# Altium PCB PCB1.PcbDoc
Units mil, origin at the board's own origin, x right, y up, seen from the top; angles counter-clockwise.
Board outline 6000 x 4000 mil, 2 copper layers (Top Layer, Bottom Layer); 16 components, 11 nets, 91 pads, 0 vias.
Unrouted connection lines stored in the file: 15.
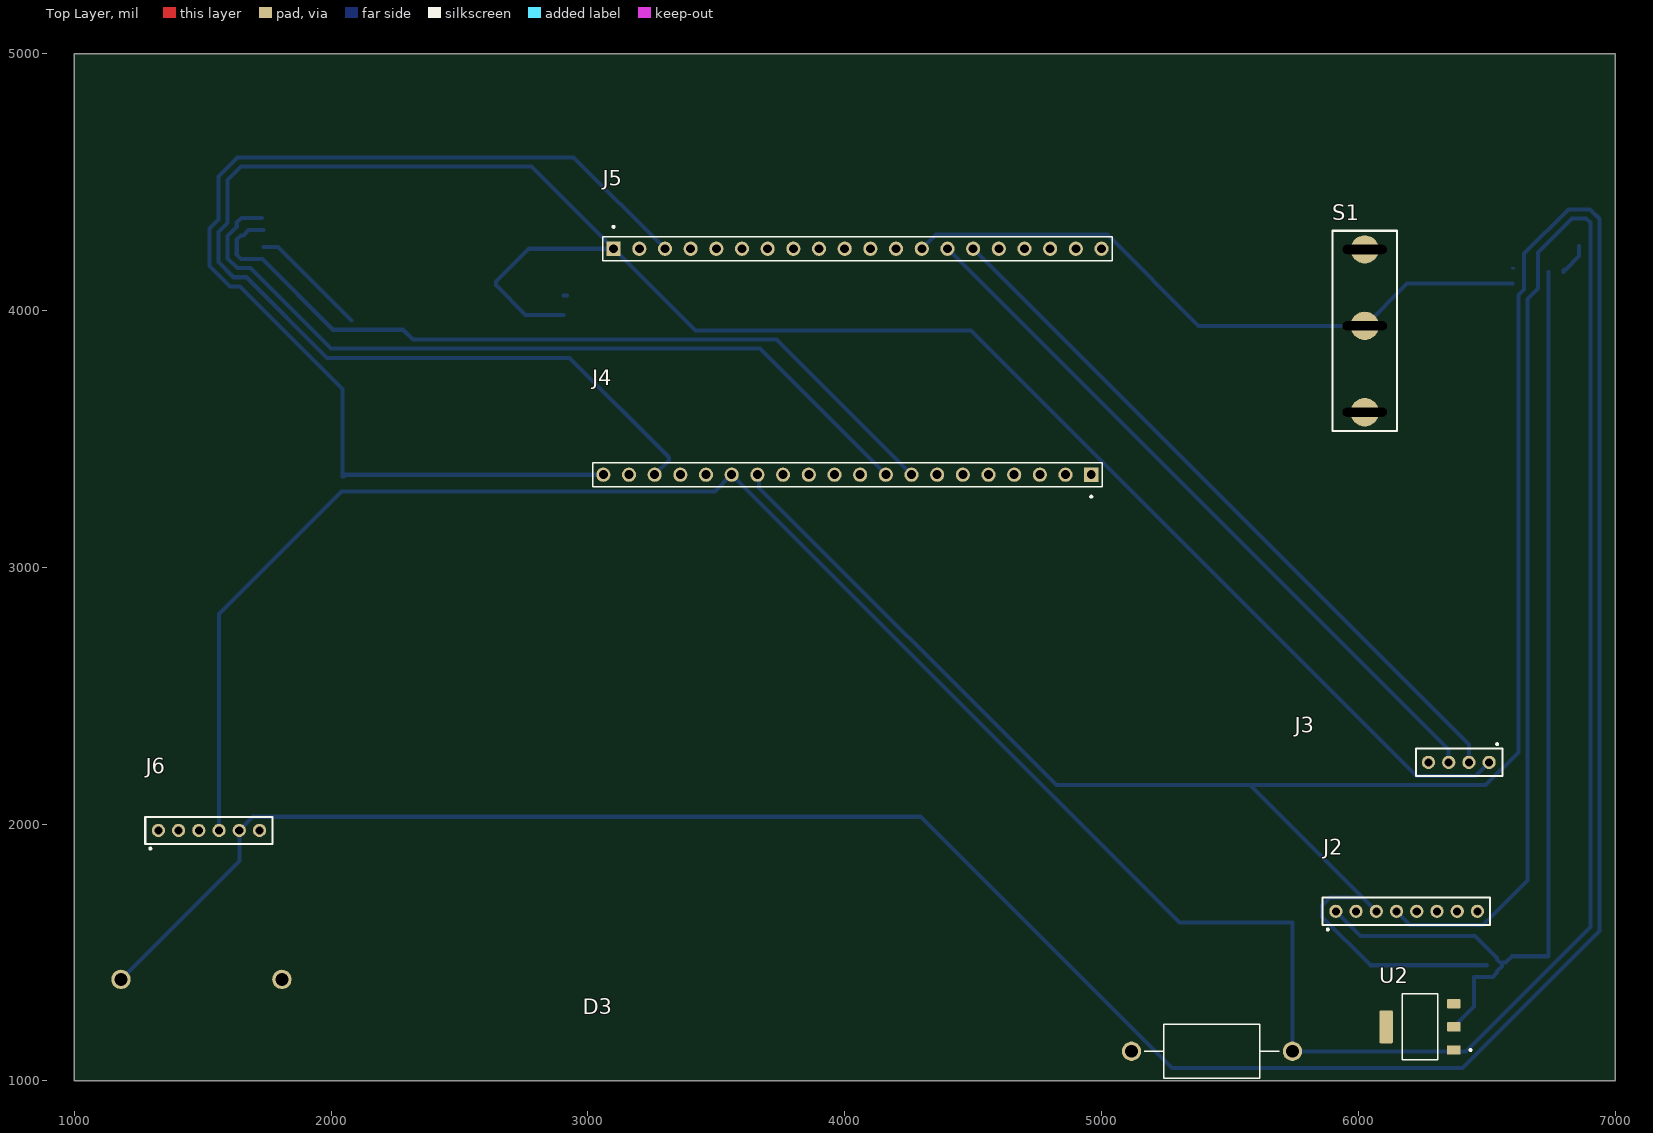
[diagram p0: Top Layer view]
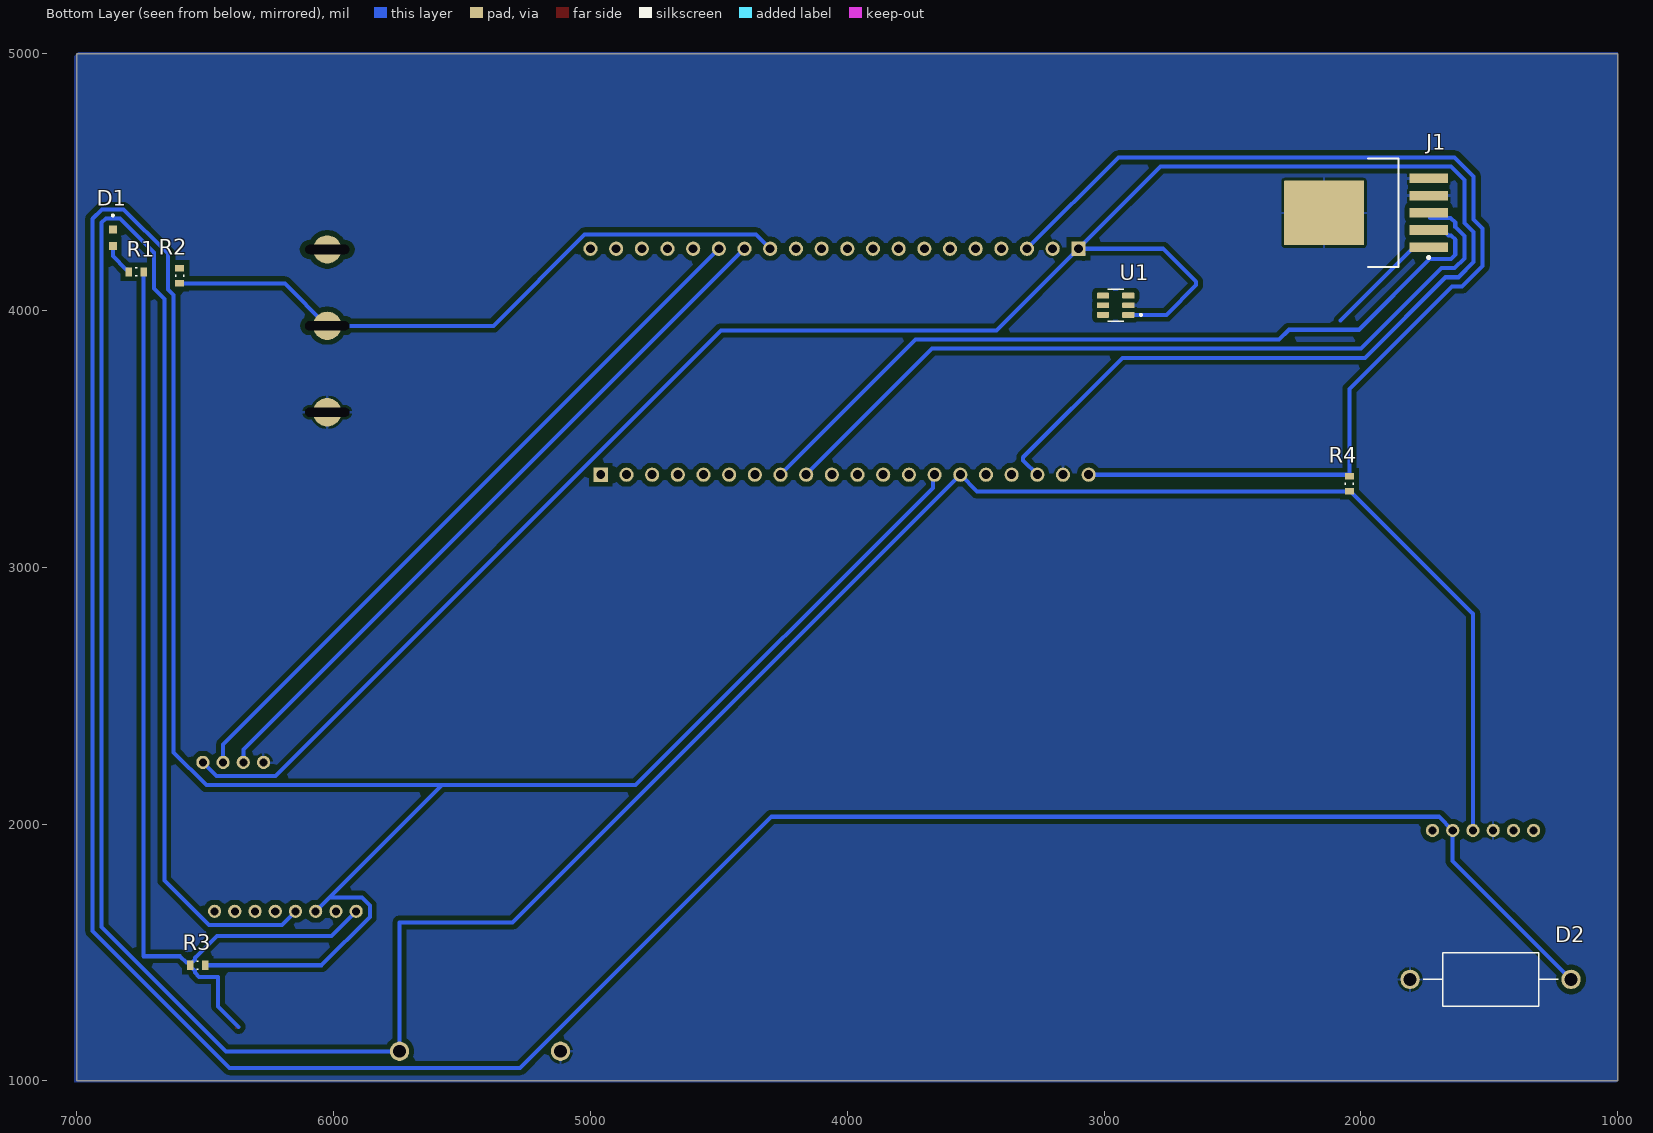
[diagram p1: Bottom Layer view, seen from below]
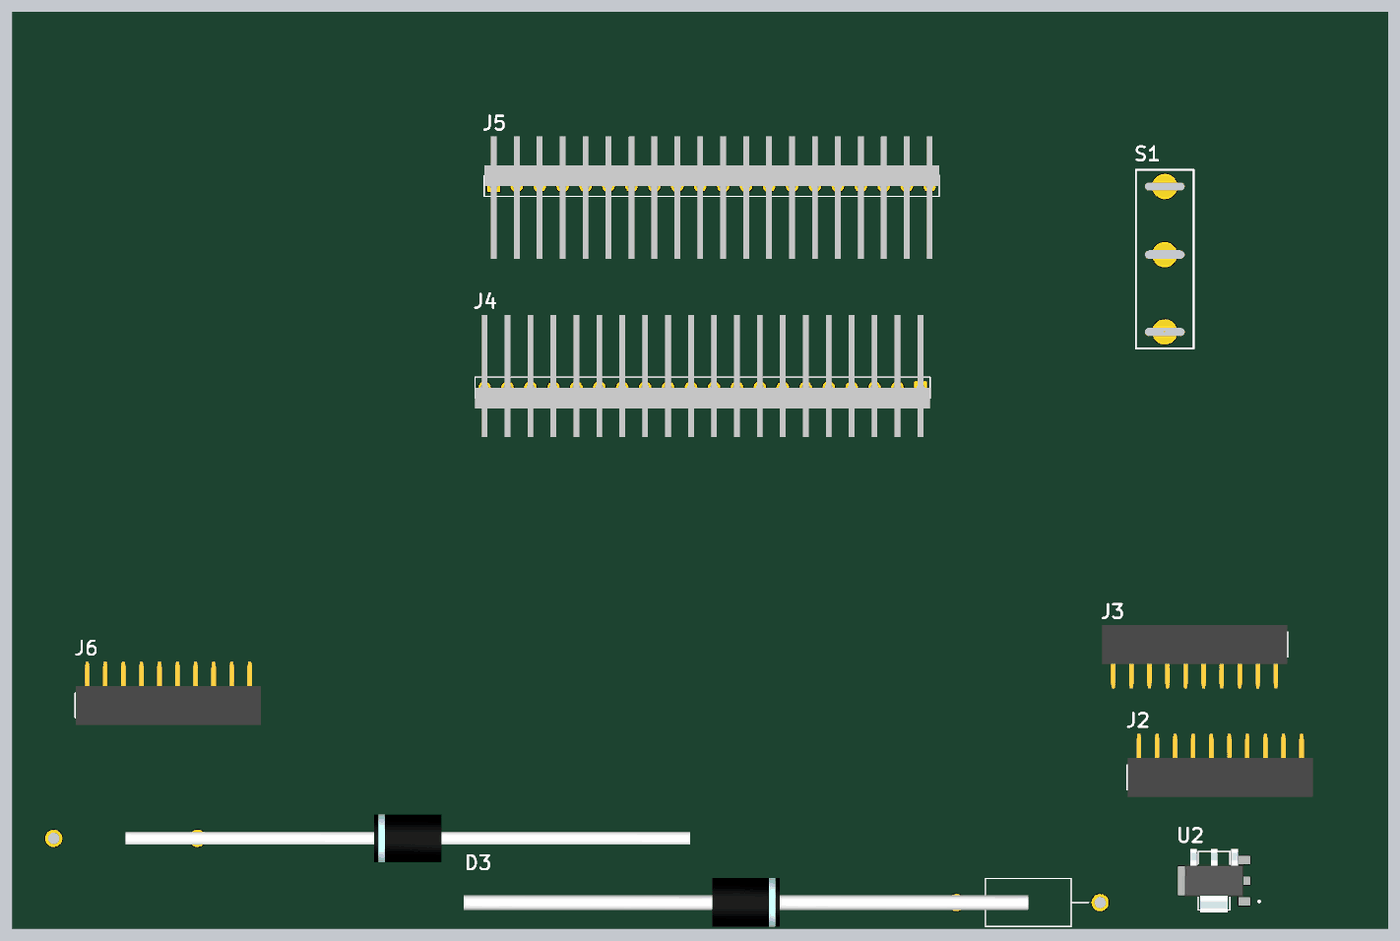
[diagram p2: 3D render of the assembled board from above, using the file's embedded part models]
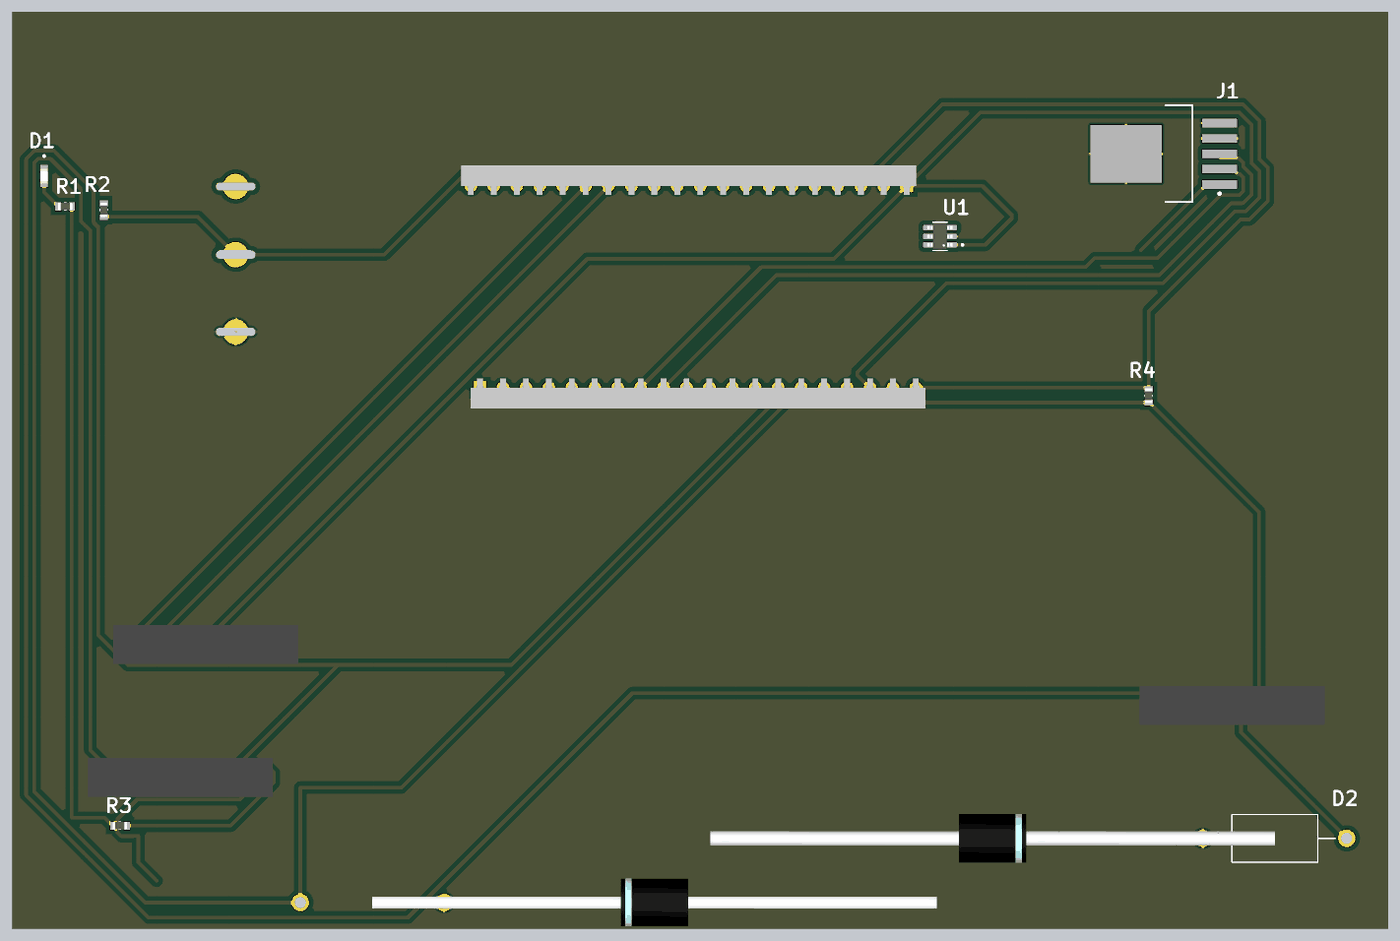
[diagram p3: 3D render of the assembled board from below, using the file's embedded part models]

## Layer stack, top to bottom
Top Solder: solder mask 0.4, Solder Resist, Dk 3.5
Top Layer: signal copper 1.4
Dielectric 1: dielectric 12.6, FR-4, Dk 4.8
Bottom Layer: signal copper 1.4
Bottom Solder: solder mask 0.4, Solder Resist, Dk 3.5

## Board outline
1000,1000 7000,1000 7000,5000 1000,5000

## Design rules (kind name [scope] priority, off if disabled: settings)
Clearance [All] p1: gap=19.68 ignorepadtopadclearanceinfootprint=FALSE
PolygonConnect [All] p1: connectstyle=Relief reliefconductorwidth=10 reliefentries=4 polygonreliefangle="90 Angle" airgapwidth=10
RoutingVias [All] p1: holewidth=28 width=50 viastyle="Through Hole" minholewidth=28 minwidth=50 maxholewidth=28 maxwidth=50
SolderMaskExpansion [All] p1: expansion=4 istentingtop=FALSE
SupplyNets "Schematic Supply Nets_2" [InNet('GND')] p1: voltage=0.000
SupplyNets "Schematic Supply Nets_1" [InNet('3V3')] p2: voltage=0.000
SupplyNets "Schematic Supply Nets" [InNet('+5')] p3: voltage=0.000
Width [All] p1: maxlimit=59.06 minlimit=15.75 preferedwidth=31.5 minimp=50.000000 maximp=50.000000 favimp=50.000000
30 further rules are at their usual default settings.

## Components (designator, comment, footprint, x,y, rotation, side; value= is the part's Value field where it differs from the comment)
D1 "led" led 6860,4282.48 r270 bottom
D2 "tvsdiode" tvsdiode 1495,1395 r0 bottom
D3 "tvsdiode" tvsdiode 5430,1115 r180 top
J1 "usbconnector" usbconnector 1980,4380 r0 bottom
J2 "8" 8 6266.85,1660 r0 top
J3 "4" 4 6155,2240 r180 top
J4 "20" 20 4010,3360 r180 top
J5 "20" 20 4050,4240 r0 top
J6 "6" 6 1681.85,1975 r0 top
R1 "smdres" smdres 6768.54,4150 r0 bottom
R2 "smdres" smdres 6600,4135 r270 bottom
R3 "smdres" smdres 6530,1450 r180 bottom
R4 "smdres" smdres 2045,3325 r270 bottom
S1 "limitswitch" limitswitch 6025,3940 r90 top
U1 "esdprotect" esdprotect 2955,4020 r0 bottom
U2 "3.3 regulator" 3.3regultor 6240,1210 r180 top

## Footprints (in the part's own frame and the unit in brackets; to place one, negate y for a bottom-side part, rotate by r counter-clockwise, add the part's x,y. Pads: shape width x height; smd on the part's side, far side on the other; paste and mask are expansions set on the pad)
3.3regultor [mm]
  rrect15% 1.31x0.93 smd: 1(-3.345,2.29) 2(-3.345,0) 3(-3.345,-2.29)
  rrect15% 1.31x3.24 smd: 4(3.345,0)
  silkscreen extent -5.1,-3.25 1.75,3.25, body extent -3.25,-3.5 3.25,3.5, height 1.8
4 [mm]
  round 1.308 hole 0.8: 1(-9,0) 2(-7,0) 3(-5,0) 4(-3,0)
  silkscreen extent -10.3,-1.9 -1.78,1.35, body extent -10.25,-2.15 10.25,4.85, height 1.25
6 [mm]
  round 1.308 hole 0.8: 1(-9,0) 2(-7,0) 3(-5,0) 4(-3,0) 5(-1,0) 6(1,0)
  silkscreen extent -10.3,-1.9 2.29,1.35, body extent -10.25,-2.15 10.25,4.85, height 1.25
8 [mm]
  round 1.308 hole 0.8: 1(-9,0) 2(-7,0) 3(-5,0) 4(-3,0) 5(-1,0) 6(1,0) 7(3,0) 8(5,0)
  silkscreen extent -10.3,-1.9 6.22,1.35, body extent -10.25,-2.15 10.25,4.85, height 1.25
20 [mil]
  rect 55x55 / inner round 55 / far side rect 55x55 hole 35: 1(-950,0)
  round 55 hole 35: 2(-850,0) 3(-750,0) 4(-650,0) 5(-550,0) 6(-450,0) 7(-350,0) 8(-250,0) 9(-150,0) 10(-50,0) 11(50,0) 12(150,0) 13(250,0) 14(350,0) 15(450,0) 16(550,0) 17(650,0) 18(750,0) 19(850,0) 20(950,0)
  silkscreen extent -992,-46 992,89, body extent -992,-318 992,215, height 46
esdprotect [mm]
  rrect25% 1.21x0.58 smd: 1(-1.255,0.95) 2(-1.255,0) 3(-1.255,-0.95) 4(1.255,-0.95) 5(1.255,0) 6(1.255,0.95)
  silkscreen extent -2.6,-1.56 0.8,1.56, body extent -1.4,-1.45 1.4,1.45, height 1.45
led [mm]
  rect 0.8x0.8 smd paste+0 mask+0.102: A(0.825,0) C(-0.825,0)
  silkscreen extent -2.32,-0.1 -2.13,0.1, body extent -0.8,-0.4 0.8,0.4, height 0.75
limitswitch [mm]
  round 2.8 hole 0.9 slot 4.4 at 90 deg: C(-8.55,0) NC(7.55,0) NO(0,0)
  silkscreen extent -10.4,-3.2 9.4,3.2
smdres [mm]
  rect 0.65x0.9 smd: 0(0.762,0) 1(-0.725,0)
  silkscreen extent -0.08,-0.4 0.08,0.4, body extent -0.8,-0.4 0.8,0.4, height 0.45
tvsdiode [mm]
  round 1.91 hole 1.27 mask+0.102: 1(-7.96,0) 2(7.96,0)
  silkscreen extent -6.68,-2.65 6.68,2.65, body extent 0,-2.7 62.5,2.7, height 2.7
usbconnector [mm] "DPAK, 5-Leads, Body 10.65x9.65mm, Pitch 1.7mm, IPC High Density"
  rrect11% 3.85x0.95 smd: 1(-6.2,3.4) 2(-6.2,1.7) 3(-6.2,0) 4(-6.2,-1.7) 5(-6.2,-3.4)
  rrect2% 7.9x6.4 smd: 6(4.15,0)
  silkscreen extent -6.32,-5.35 -0.2,5.35, body extent -3.2,-5.32 6.45,5.33, height 4.83

## Part data
D1: "Green 1.6 x 0.8 x 0.75 mm (0603) 120 Âº 180 mcd Water Clear SMT LED", Package=Package, Check_prices=https://www.snapeda.com/parts/APT1608VGC/A/Kingbright/view-part/?ref=eda, MF=Kingbright, MP=APT1608VGC/A, SnapEDA_Link=https://www.snapeda.com/parts/APT1608VGC/A/Kingbright/view-part/?ref=snap
D2 D3: "59V Clamp 169A (8/20Âµs) Ipp Tvs Diode Through Hole DO-201", Package="DO-201 Littelfuse", Check_prices=https://www.snapeda.com/parts/1.5KE33CA/STMicroelectronics/view-part/?ref=eda, MF=STMicroelectronics, MP=1.5KE33CA, SnapEDA_Link=https://www.snapeda.com/parts/1.5KE33CA/STMicroelectronics/view-part/?ref=snap
J1: library part CMP-1752-00001-1, "Single USB 2.0, Receptacle Connecter, B Type, 4 Position Through Hole, -55 to 85 degC, RoHS, Tray", ComponentLink1Description=Datasheet, ComponentLink1URL=https://cdn.harwin.com/pdfs/M701-330442.pdf, DatasheetVersion=Oct-15, PackageDescription="USB Connecter, 4 Position Through Hole, Length 12.04 mm, Height 16.25 mm, Tail Length 3.1 mm", PackageReference=M701-330442
J2 J3 J6: "Female header Temperature range: -40 ... +125 Â°C Colour: Black Connector Design: Single Row / Straight Connector Termination: THT Contact material: Gold-Plated Copper Gender of contacts: Female Housing Material: Polybutylene Terephthalate (PBT) Pitch: 2", Package=None, Check_prices=https://www.snapeda.com/parts/62001011821/W%25C3%25BCrth+Elektronik+Midcom/view-part/?ref=eda, MF="WÃ¼rth Elektronik", MP=62001011821, SnapEDA_Link=https://www.snapeda.com/parts/62001011821/W%25C3%25BCrth+Elektronik+Midcom/view-part/?ref=snap
J4 J5: "AMPMODU 20 Position Through-Hole Single Row Straight .100 Inch Header", Package=None, Centerline_Pitch="2.54 mm[.1 in]", Check_prices=https://www.snapeda.com/parts/2-87224-0/TE+Connectivity+AMP+Connectors/view-part/?ref=eda, EU_RoHS_Compliance=Compliant, MF="TE Connectivity", MP=2-87224-0, Number_of_Positions=20, Product_Type=Connector, SnapEDA_Link=https://www.snapeda.com/parts/2-87224-0/TE+Connectivity+AMP+Connectors/view-part/?ref=snap
R1 R2 R3 R4: "RES SMD 470 OHM 1% 1/10W 0603", Package="1608-2 Panasonic", Check_prices=https://www.snapeda.com/parts/ERJS03F4700V/Panasonic/view-part/?ref=eda, MF=Panasonic, MP=ERJS03F4700V, SnapEDA_Link=https://www.snapeda.com/parts/ERJS03F4700V/Panasonic/view-part/?ref=snap
S1: "Switch Snap Action N.O./N.C. SPDT Long Hinge Lever Solder 5A 250VAC 0.39N Screw Mount", Package=None, Check_prices=https://www.snapeda.com/parts/SS-5GL111/Omron/view-part/?ref=eda, MF=Omron, MP=SS-5GL111, SnapEDA_Link=https://www.snapeda.com/parts/SS-5GL111/Omron/view-part/?ref=snap
U1: "Current-limit switch and D+/Dâ€“ ESD protection for USB Host", Package="SOT-23-6 Texas Instruments", Check_prices=https://www.snapeda.com/parts/TPD3S044DBVR/Texas+Instruments/view-part/?ref=eda, MF="Texas Instruments", MP=TPD3S044DBVR, SnapEDA_Link=https://www.snapeda.com/parts/TPD3S044DBVR/Texas+Instruments/view-part/?ref=snap
U2: "LDO Voltage Regulators 800MA LDO LINEAR REG", Package="SOT-223 Seeed Technology", Check_prices=https://www.snapeda.com/parts/AMS1117-3.3/ams/view-part/?ref=eda, MF="ams AG", MP=AMS1117-3.3, SnapEDA_Link=https://www.snapeda.com/parts/AMS1117-3.3/ams/view-part/?ref=snap

## Nets (pads, with @x,y where several pads share a name; then routed paths per layer and width w, separated by ;. In a path a pad name is that pad's centre, name@x,y a point inside that pad or via, vN(x,y) a via of type N, cw(c..) or ccw(c..) an arc to the next point about the centre after c; other vN are vias at no path point)
3V3: J2.1 J4.20 J5.3 R1.1 R2.1 R3.1 R4.1 U2.2 | length 8327.4
  Top Layer w15.75: U2.2 U2.2@6379.17,1210
  Bottom Layer w10: R2.1 R2.1@6604.92,4163.54
  Bottom Layer w15.75: J4.20 2056.38,3360 2049.92,3353.54 R4.1 2045,3693.66 1645.08,4093.58 1605.88,4093.58 1526.26,4173.2 1526.26,4319.08 1561.69,4354.52 1561.69,4522.01 1635.23,4595.55 2944.45,4595.55 J5.3 ; J2.1 6007.95,1564.57 6454.92,1564.57 6540.35,1479.13 6540.35,1473.11 R3.1@6558.54,1454.92 ; 6370,1210 6450,1290 6450,1405 6469.86,1405 6470.14,1404.72 6524.21,1404.72 6540.35,1420.87 6540.35,1426.89 6558.54,1445.08 R3.1 R3.1@6558.54,1454.92 ; R1.1 6740,1485 6598.46,1485 6573.31,1459.84 6563.46,1459.84 R3.1@6558.54,1454.92
+5: J1.1 J3.1 J4.18 J5.1 J6.1 U1.1 U1.3 U2.3 | length 9771.7
  Bottom Layer w15.75: J1.1 1792.99,4246.14 2079.13,3960 ; U1.1 2757.4,3982.6 2641.52,4098.48 2641.52,4111.52 2770,4240 J5.1 ; U1.3 U1.3@2917.99,4057.4 ; J5.1@3080.37,4219.78 3080.37,4220.37 J5.1 ; J4.18 3315.06,3415.06 3315.06,3428.11 2927.83,3815.33 1984.35,3815.33 1670.66,4129.02 1620.55,4129.02 1561.69,4187.88 1561.69,4304.41 1597.13,4339.84 1597.13,4507.34 1649.91,4560.12 2779.88,4560.12 J5.1 ; J3.1 6456.02,2186.69 6227.28,2186.69 4492.35,3921.63 3418.37,3921.63 J5.1
GND: D1.C D2.2 D3.2 J1.4 J1.5 J1.6 J2.2 J3.4 J4.19 J5.2 J6.3 S1.C U1.2 U2.1
I2C_SCL: D2.1 J2.3 J4.14 J6.5 R3.0 | length 16991.3
  Bottom Layer w15.75: D2.1 1642.48,1855.87 J6.5 1695.79,2028.31 4295.45,2028.31 5273.92,1049.84 6405.06,1049.84 6938.74,1583.52 6938.74,4356.8 6901.84,4393.7 6818.16,4393.7 6645.28,4220.82 6645.28,4080.79 6623.88,4059.39 6623.88,2279.16 6495.98,2151.26 5578.74,2151.26 ; J4.14 3666.58,3353.42 3666.58,3308.88 4824.2,2151.26 5578.74,2151.26 ; J2.3 6016.69,1713.31 ; R3.0 6047.13,1450 5859.21,1637.92 5859.21,1682.08 5890.44,1713.31 6016.69,1713.31 ; 5578.74,2151.26 6016.69,1713.31
I2C_SDA: D3.1 J2.4 J4.15 J6.4 R4.0 | length 13906.7
  Bottom Layer w15.75: J6.4 1563.74,2818.66 2040.08,3295 R4.0 3495,3295 J4.15 5303.64,1616.36 5743.39,1616.36 D3.1 6420.11,1115 6903.31,1598.2 6903.31,4342.12 6887.16,4358.27 6832.84,4358.27 6699.65,4225.08 6699.65,4085.05 6659.31,4044.71 6659.31,1780.22 6485.78,1606.69 6202.05,1606.69 J2.4
LIM_SW: J5.13 R2.0 S1.NO | length 2538.2
  Bottom Layer w15.75: J5.13 4355.06,4295.06 5022.81,4295.06 5377.87,3940 S1.NO 6190,4105 R2.0
NetD1_A: D1.A R1.0 | length 128.3
  Bottom Layer w15.75: R1.0 6798.54,4154.92 6803.46,4159.84 6808.39,4159.84 6860,4211.46 D1.A
US_ECHO: J3.3 J5.14 | length 2808.5
  Bottom Layer w15.75: J5.14 6350.63,2289.37 6350.63,2241.22 J3.3
US_TRIG: J3.2 J5.15 | length 2799.7
  Bottom Layer w15.75: J5.15 6430.59,2309.41 J3.2
USB_DM: J1.2 J4.8 | length 3159.4
  Bottom Layer w15.75: J1.2 1678.82,4313.07 1658.15,4292.4 1649.91,4292.4 1632.56,4275.05 1632.56,4217.23 1649.91,4199.88 1732.06,4199.88 2007.37,3924.57 2279.82,3924.57 2318.2,3886.2 3733.8,3886.2 J4.8
USB_DP: J1.3 J4.9 | length 3170.9
  Bottom Layer w15.75: 1730,4360 1650.58,4360 1632.56,4341.98 1632.56,4325.16 1597.13,4289.73 1597.13,4202.55 1635.23,4164.45 1685.34,4164.45 1999.03,3850.76 3669.24,3850.76 J4.9
pads on no net: J2.5 J2.6 J2.7 J2.8 J4.1 J4.2 J4.3 J4.4 J4.5 J4.6 J4.7 J4.10 J4.11 J4.12 J4.13 J4.16 J4.17 J5.4 J5.5 J5.6 J5.7 J5.8 J5.9 J5.10 J5.11 J5.12 J5.16 J5.17 J5.18 J5.19 J5.20 J6.2 J6.6 S1.NC U1.4 U1.5 U1.6 U2.4

## Polygon pours and split planes (outlines as drawn)
GND on Bottom Layer "GND_L02_P000" (solid, pour order 0): 1000,5005 1000,1000 1005,995 7010,995 7010,4990 6995,5005